# Altium PCB PCB3.PcbDoc
Units mm, origin at the board's own origin, x right, y up, seen from the top; angles counter-clockwise.
Board outline 100 x 100 mm, 2 copper layers (Top Layer, Bottom Layer); 48 components, 44 nets, 134 pads, 8 vias.
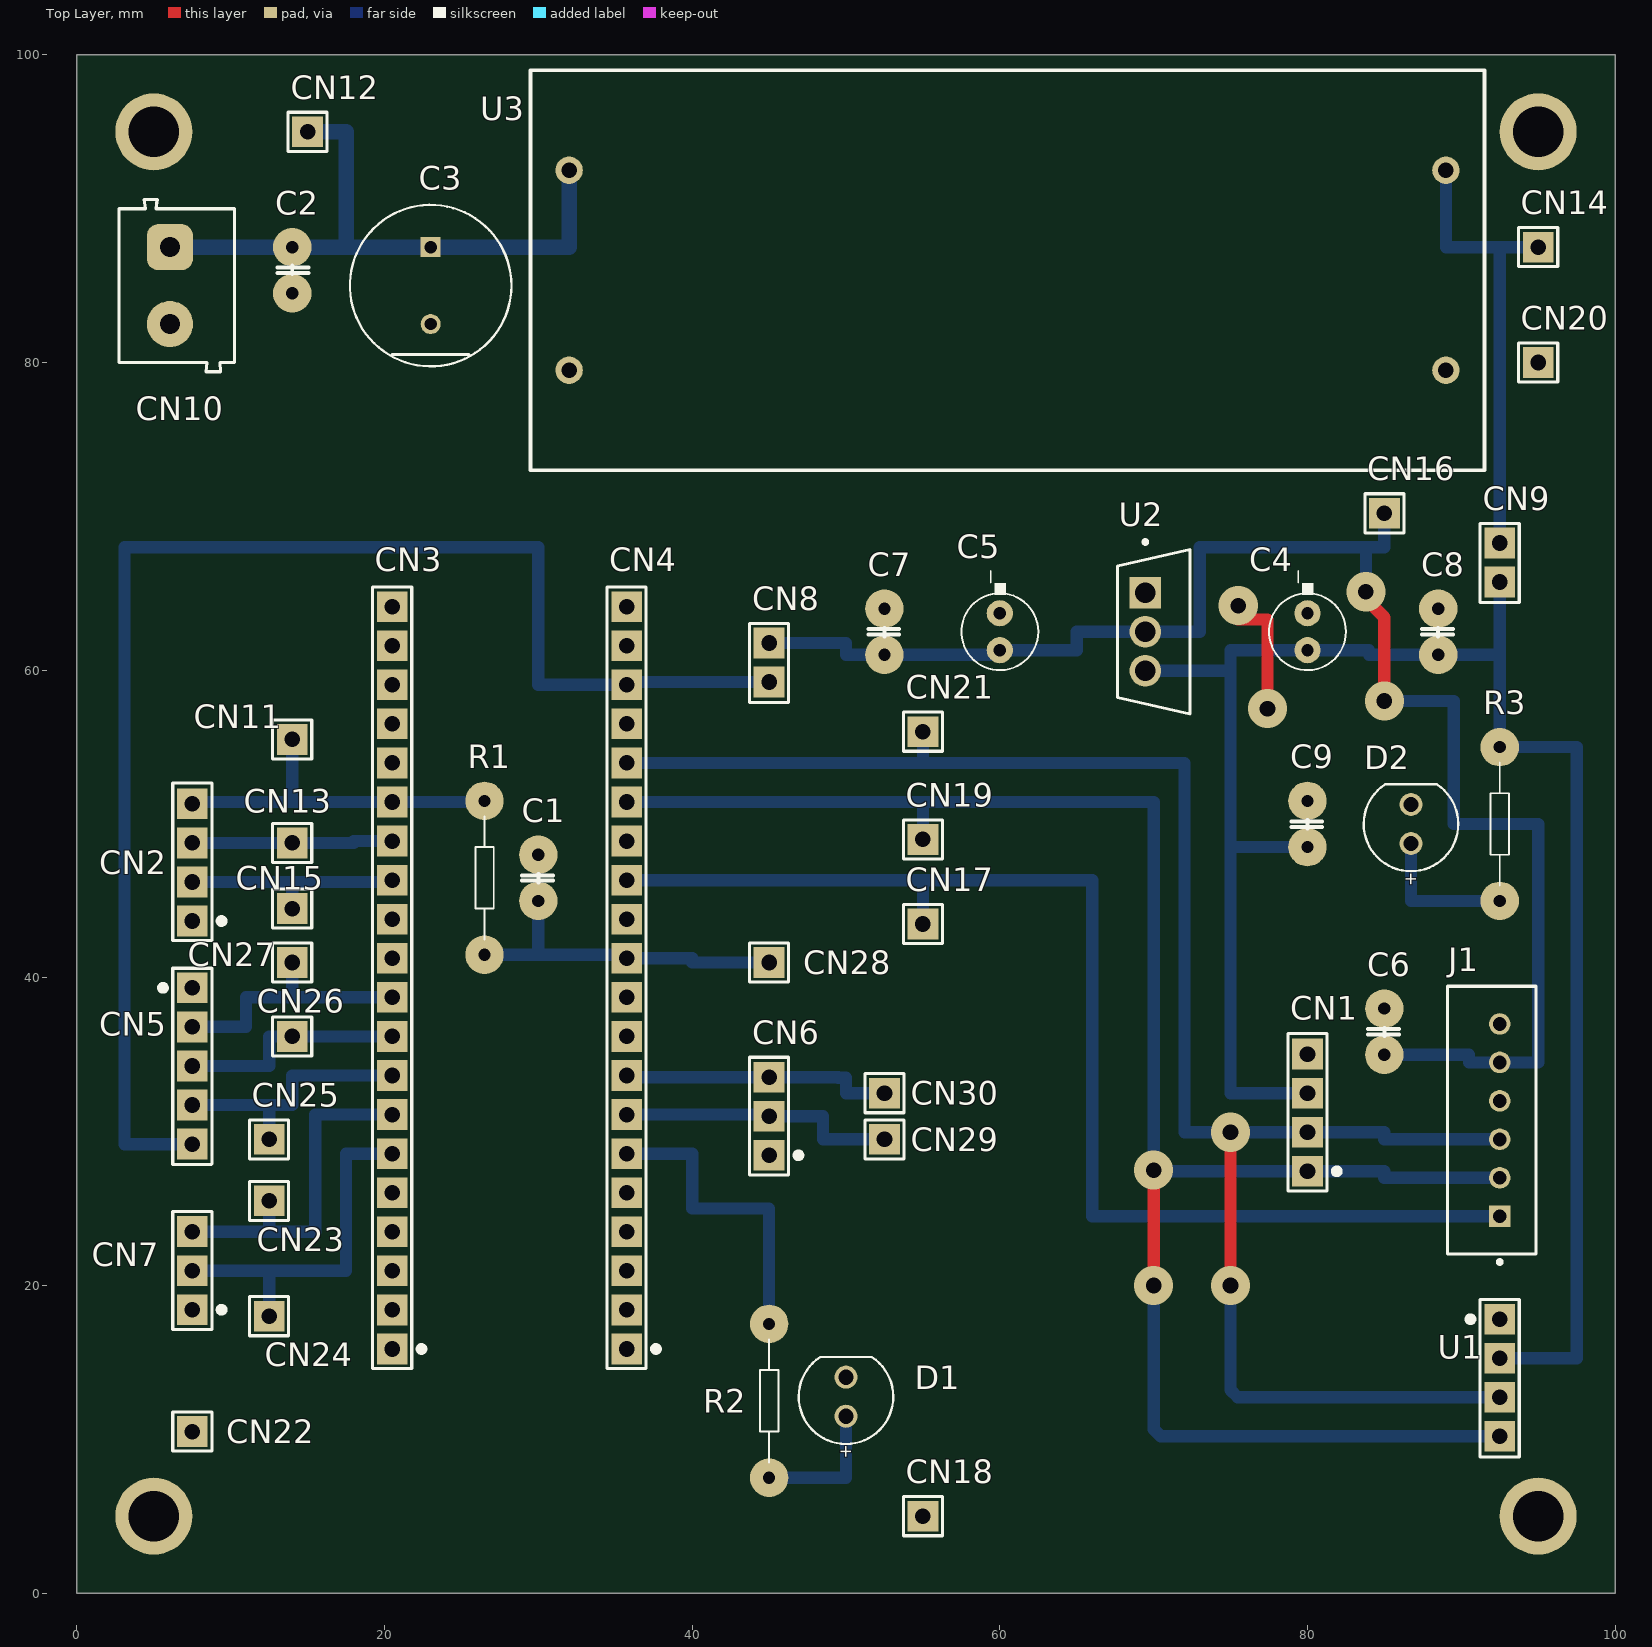
[diagram p0: Top Layer view]
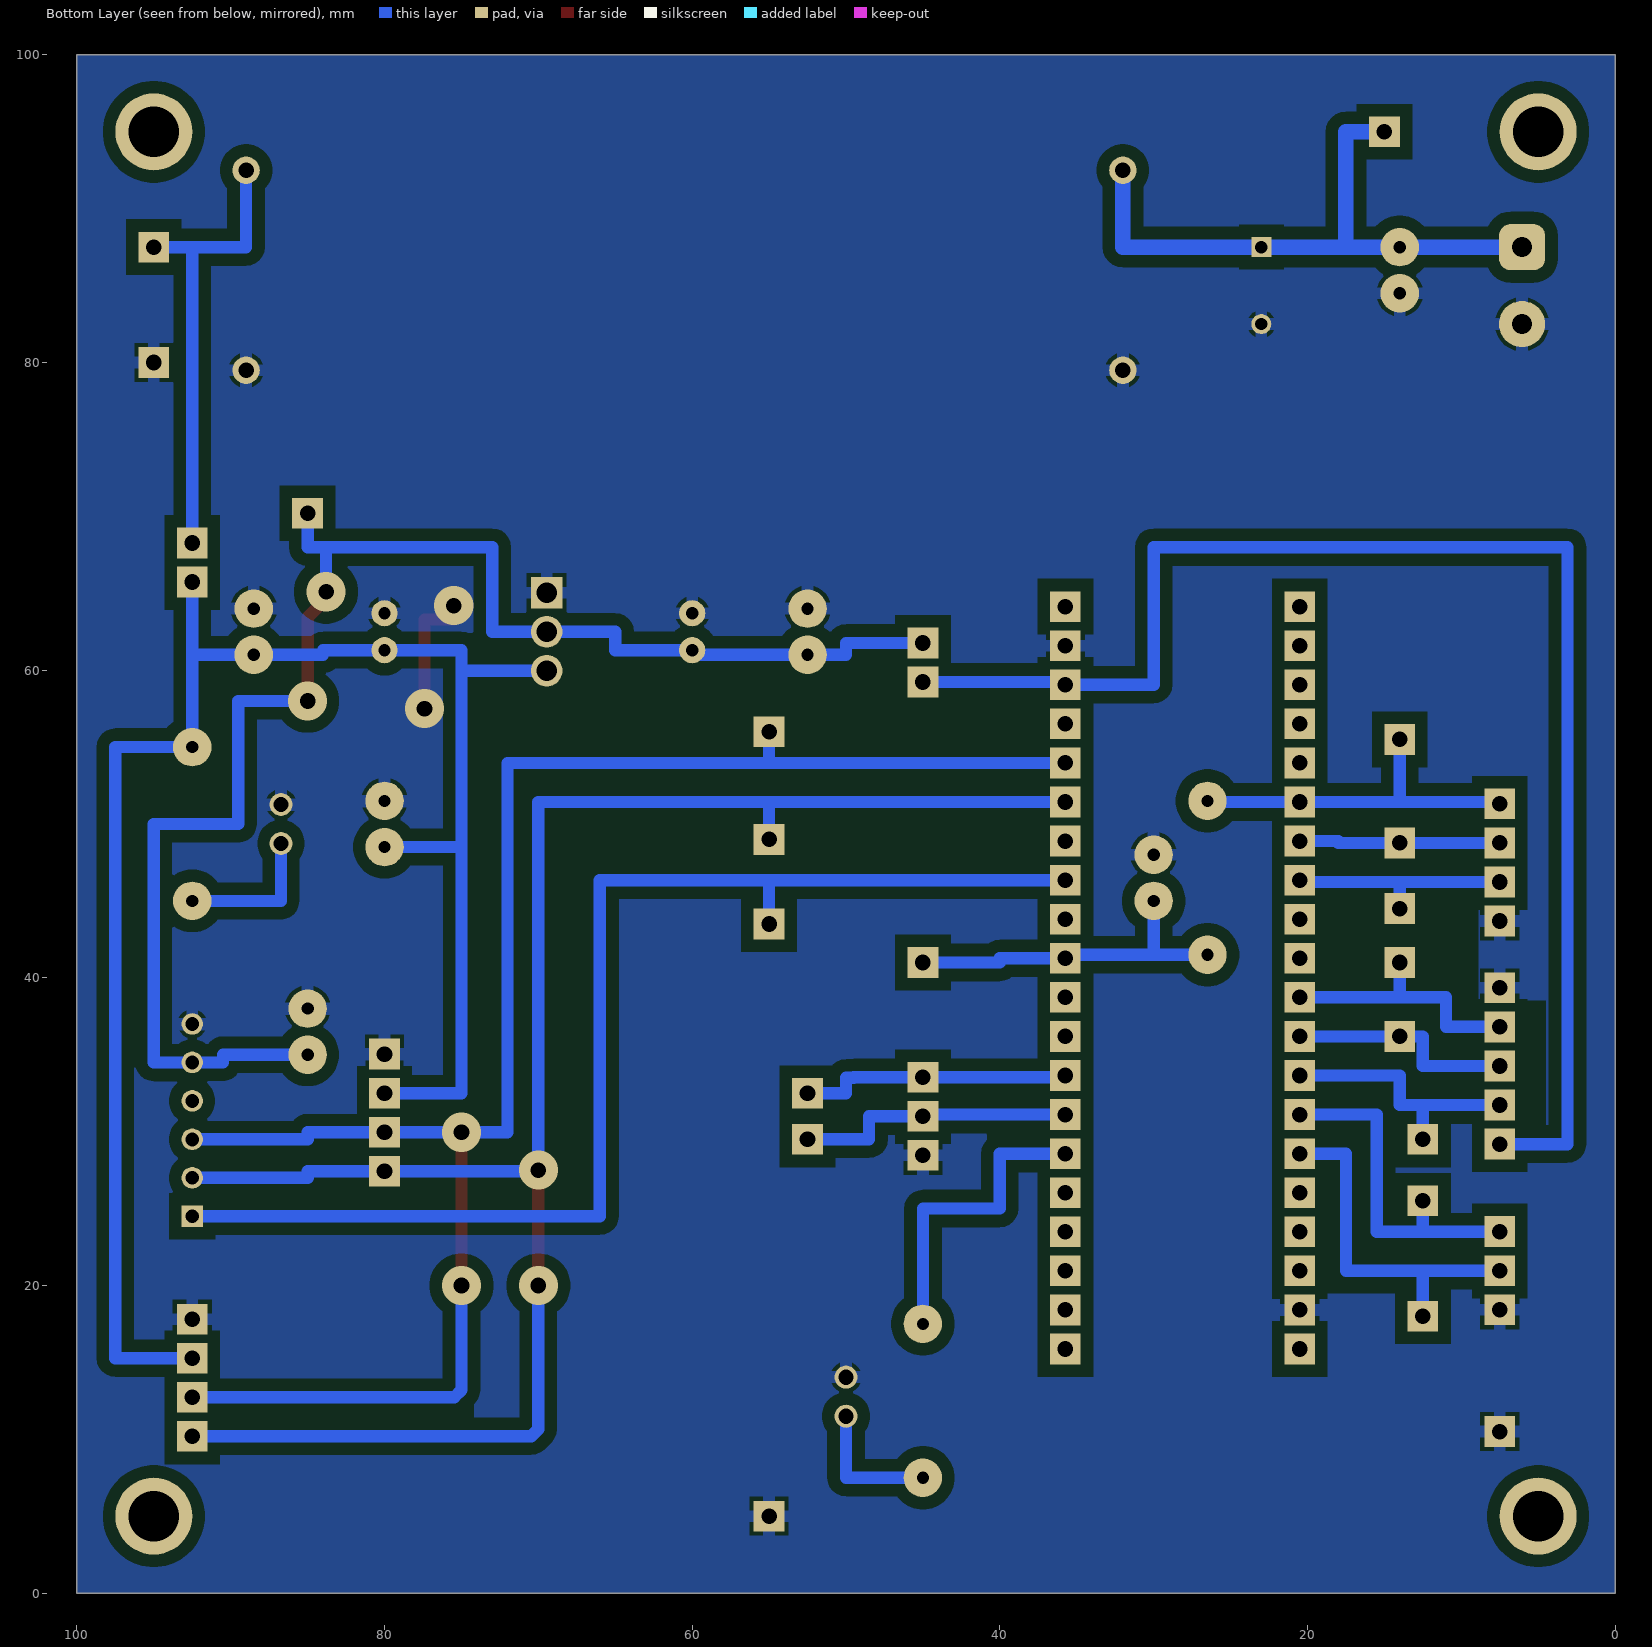
[diagram p1: Bottom Layer view, seen from below]

## Layer stack, top to bottom
Top Solder: solder mask 0.0102, Solder Resist, Dk 3.5
Top Layer: signal copper 0.0356
Dielectric 1: dielectric 0.32, FR-4, Dk 4.8
Bottom Layer: signal copper 0.0356
Bottom Solder: solder mask 0.0102, Solder Resist, Dk 3.5

## Board outline
0,0 100,0 100,100 0,100

## Design rules (kind name [scope] priority, off if disabled: settings)
Clearance Clearance_1 [OnMid vs OnMid] p1: gap=0.4 ignorepadtopadclearanceinfootprint=FALSE sourcerule=36 cellrowname=All cellrowtype=0 cellcolname=All cellcoltype=0 innerlayers=TRUE
Clearance Clearance_2 [(ExistsOnLayer('Top Layer') Or ExistsOnLayer('Bottom Layer')) vs (ExistsOnLayer('Top Layer') Or ExistsOnLayer('Bottom Layer'))] p2: gap=0.4 ignorepadtopadclearanceinfootprint=FALSE sourcerule=36 cellrowname=All cellrowtype=0 cellcolname=All cellcoltype=0 outerlayers=TRUE
Clearance [All] p3: gap=0.254 ignorepadtopadclearanceinfootprint=FALSE ismatrix=TRUE
PolygonConnect [All] p1: connectstyle=Relief reliefconductorwidth=0.8 reliefentries=4 polygonreliefangle="90 Angle" airgapwidth=0.254
RoutingVias [All] p1: holewidth=1.016 width=2.54 viastyle="Through Hole" minholewidth=1.016 minwidth=2.54 maxholewidth=1.016 maxwidth=2.54
SolderMaskExpansion [All] p1: expansion=0.102 istentingtop=FALSE
Width [All] p1: maxlimit=1 minlimit=0.254 preferedwidth=0.8 minimp=50.000000 maximp=50.000000 favimp=50.000000
30 further rules are at their usual default settings.

## Classes and differential pairs
component class TestPoints: CN11 CN12 CN13 CN14 CN15 CN16 CN17 CN18 CN19 CN20 CN21 CN22 CN23 CN24 CN25 CN26 CN27 CN28 CN29 CN30
component class PowerStage: C2 C3 C4 C5 C6 C7 C8 C9 CN9 CN10 D2 R3 U2 U3
component class MainCircuit: C1 CN1 CN2 CN3 CN4 CN5 CN6 CN7 CN8 D1 J1 R1 R2 U1

## Components (designator, comment, footprint, x,y, rotation, side; value= is the part's Value field where it differs from the comment)
C1 "C" CAP_Axial_0.2mm 30,46.5 r90 top
C2 "0.1uF" CAP_Axial_0.2mm 14,86 r270 top
C3 "470uF" C_RAD_11MM 23,85 r90 top
C4 "330uF" C_RAD_5mm 80,62.5 r90 top
C5 "330uF" C_RAD_5mm 60,62.5 r90 top
C6 "0.1uF" CAP_Axial_0.2mm 85,36.5 r90 top
C7 "0.1uF" CAP_Axial_0.2mm 52.5,62.5 r90 top
C8 "0.1uF" CAP_Axial_0.2mm 88.5,62.5 r90 top
C9 "0.1uF" CAP_Axial_0.2mm 80,50 r90 top
CN1 "Header 4X1_Female" 1*4P_FEMALE 80,31.23 r90 top
CN2 "Header 4X1_Female" 1*4P_FEMALE 7.5,47.5 r90 top
CN3 "Header 20x1_Female" 1*20P_FEMALE 20.5,40 r90 top locked
CN4 "Header 20X1_Female" 1*20P_FEMALE 35.74,40 r90 top locked
CN5 "Header 5X1_Female" 1*5P_FEMALE 7.5,33 r270 top
CN6 "Header 3X1_Female" 1*3P_FEMALE 45,31 r90 top
CN7 "Header 3X1_Female" 1*3P_FEMALE 7.5,20.96 r90 top
CN8 "Header 2X1_Male Jumper" "JUMPER 2x1 PIN" 45,60.5 r270 top
CN9 "Header 2X1_Male Jumper" "JUMPER 2x1 PIN" 92.5,67 r270 top
CN10 "CONN_02P" TERMINAL_BLOCK_2_PIN 6.5,85 r270 top
CN11 "Header 1X1_Male" 1*1P_MALE 14,55.5 r90 top
CN12 "Header 1X1_Male" 1*1P_MALE 15,95 r90 top
CN13 "Header 1X1_Male" 1*1P_MALE 14,48.77 r90 top
CN14 "Header 1X1_Male" 1*1P_MALE 95,87.5 r90 top
CN15 "Header 1X1_Male" 1*1P_MALE 14,44.5 r90 top
CN16 "Header 1X1_Male" 1*1P_MALE 85,70.2 r90 top
CN17 "Header 1X1_Male" 1*1P_MALE 55,43.5 r90 top
CN18 "Header 1X1_Male" 1*1P_MALE 55,5 r90 top
CN19 "Header 1X1_Male" 1*1P_MALE 55,49 r90 top
CN20 "Header 1X1_Male" 1*1P_MALE 95,80 r90 top
CN21 "Header 1X1_Male" 1*1P_MALE 55,56 r90 top
CN22 "Header 1X1_Male" 1*1P_MALE 7.5,10.5 r90 top
CN23 "Header 1X1_Male" 1*1P_MALE 12.5,25.5 r90 top
CN24 "Header 1X1_Male" 1*1P_MALE 12.5,18 r90 top
CN25 "Header 1X1_Male" 1*1P_MALE 12.5,29.5 r90 top
CN26 "Header 1X1_Male" 1*1P_MALE 14,36.19 r90 top
CN27 "Header 1X1_Male" 1*1P_MALE 14,41 r90 top
CN28 "Header 1X1_Male" 1*1P_MALE 45,41 r90 top
CN29 "Header 1X1_Male" 1*1P_MALE 52.5,29.5 r90 top
CN30 "Header 1X1_Male" 1*1P_MALE 52.5,32.5 r90 top
D1 "RED LED" LED_DIODE_3.9mm 50,12.77 r90 top
D2 "RED LED" LED_DIODE_3.9mm 86.73,50 r90 top
J1 "B6B-XH-A(LF)(SN)" "JST 6 PIN CONNECTOR" 91.975,30.75 r90 top
R1 "R" RES_AXIAL_3.2_6MM 26.5,46.5 r270 top
R2 "200" RES_AXIAL_3.2_6MM 45,12.5 r90 top
R3 "330" RES_AXIAL_3.2_6MM 92.5,50 r90 top
U1 "Display LCD 1604 i2c Module" 1*4P_FEMALE 92.5,14 r270 top
U2 "IRU1050" IRU1050 70,62.5 r0 top
U3 "STEP_DOWN MODULE" STEP_DOWN_MODULE 60.5,86 r0 top

## Footprints (in the part's own frame and the unit in brackets; to place one, negate y for a bottom-side part, rotate by r counter-clockwise, add the part's x,y. Pads: shape width x height; smd on the part's side, far side on the other; paste and mask are expansions set on the pad)
1*1P_MALE [mm]
  rect 2x2 hole 1.016: 1(0,0)
  silkscreen extent -1.27,-1.27 1.27,1.27, body extent -1.27,-1.19 1.27,1.3, height 8.54
1*3P_FEMALE [mm]
  rect 2x2 hole 1.016: 1(-2.54,0) 2(0,0) 3(2.54,0)
  silkscreen extent -3.81,-2.1 3.84,1.27, body extent -3.81,-1.27 3.81,1.27, height 8.89
1*4P_FEMALE [mm]
  rect 2x2 hole 1.016: 1(-3.81,0) 2(-1.27,0) 3(1.27,0) 4(3.81,0)
  silkscreen extent -5.08,-2.1 5.16,1.27, body extent -5.08,-1.27 5.08,1.27, height 8.89
1*5P_FEMALE [mm]
  rect 2x2 hole 1.016: 1(-6.35,0) 2(-3.81,0) 3(-1.27,0) 4(1.27,0) 5(3.81,0)
  silkscreen extent -7.62,-2.09 5.13,1.27, body extent -7.67,-1.27 5.03,1.32, height 9.2
1*20P_FEMALE [mm]
  rect 2x2 hole 1.016: 1(-24.13,0) 2(-21.59,0) 3(-19.05,0) 4(-16.51,0) 5(-13.97,0) 6(-11.43,0) 7(-8.89,0) 8(-6.35,0) 9(-3.81,0) 10(-1.27,0) 11(1.27,0) 12(3.81,0) 13(6.35,0) 14(8.89,0) 15(11.43,0) 16(13.97,0) 17(16.51,0) 18(19.05,0) 19(21.59,0) 20(24.13,0)
  silkscreen extent -25.4,-2.1 25.4,1.27, body extent -25.65,-1.27 25.65,1.27, height 8.5
C_RAD_5mm [mm]
  round 1.7 hole 0.8: 1(-1.2,0) 2(1.2,0)
  silkscreen extent -2.5,-2.5 3.95,2.5, body extent -2.95,-2.95 3.05,3.05, height 14
C_RAD_11MM [mm]
  rect 1.3x1.3 hole 0.8 paste-2539.97 mask+0: 1(2.5,0)
  round 1.3 hole 0.8 paste-2539.97 mask+0: 2(-2.5,0)
  silkscreen extent -5.25,-5.25 5.25,5.25, body extent -5.35,-5.35 5.35,5.35, height 0.25
CAP_Axial_0.2mm [mm]
  round 2.5 hole 0.8: 1(-1.5,0) 2(1.5,0)
  silkscreen extent -0.3,-0.95 0.25,1.05, body extent -1.85,-1.25 2.85,1.25, height 8.35
IRU1050 [mm]
  rect 2.05x2.05 hole 1.35 paste-2539.97 mask+0: 1(-0.54,2.535)
  round 2.05 hole 1.35 paste-2539.97 mask+0: 2(-0.54,0) 3(-0.54,-2.535)
  silkscreen extent -2.35,-5.34 2.35,5.96, body extent -2.45,-5.44 2.45,5.44, height 0.25
"JST 6 PIN CONNECTOR" [mm]
  rect 1.4x1.4 hole 0.9 paste-2539.97 mask+0: 1(-6.25,-0.525)
  round 1.4 hole 0.9 paste-2539.97 mask+0: 2(-3.75,-0.525) 3(-1.25,-0.525) 4(1.25,-0.525) 5(3.75,-0.525) 6(6.25,-0.525)
  silkscreen extent -9.35,-2.88 8.7,2.88, body extent -8.8,-2.98 8.8,2.98, height 0.25
"JUMPER 2x1 PIN" [mm]
  rect 2x2 hole 1.016: 1(-1.27,0) 2(1.27,0)
  silkscreen extent -2.54,-1.27 2.6,1.27, body extent -2.54,-1.19 2.54,1.3, height 8.54
LED_DIODE_3.9mm [mm] "THT Mono-color Round Color LED, 2-leads"
  round 1.5 hole 1: A(-1.27,0) K(1.27,0)
  silkscreen extent -3.07,-3.07 2.58,3.08, body extent -2.95,-2.95 2.45,2.95, height 9.2
RES_AXIAL_3.2_6MM [mm] "Resistor 1/8 W L=3.2mm W=6mm"
  round 2.5 hole 0.8: 1(-5,0) 2(5,0)
  silkscreen extent -4,-0.6 4,0.6, body extent -5.23,-1 5.22,1, height 2.5
STEP_DOWN_MODULE [mil]
  round 70 hole 40: 1(-1122.05,255.91) 2(-1122.05,-255.91) 3(1122.05,255.91) 4(1122.05,-255.91)
  silkscreen extent -1220,-512 1220,512, body extent -1172,-417 1172,378, height 793
TERMINAL_BLOCK_2_PIN [mm] "5,00mm - modular - blue - Horizontal entry with pressure clamp - 9,9 mm height - 02p"
  rrect50% 3x3 hole 1.3: 1(-2.5,-0.45)
  round 3 hole 1.3: 2(2.5,-0.45)
  silkscreen extent -5.6,-3.75 5.6,3.75, body extent -5.6,-3.75 5.6,3.75, height 9.96

## Part data
C1 C2 C6 C7 C8 C9: library part CAP_NP, "Non-Polarized Capacitor"
C3 C4 C5: library part Cap_Pol, "Polarized Capacitor"
CN1 CN2: "Header, 4-Pin, Single row,female", LatestRevisionDate=17-Jul-2002, LatestRevisionNote="Re-released for DXP Platform.", Publisher="Altium Limited"
CN3: "Header, 16-Pin, Single row,female"
CN4: library part "Header 20x1_Female", "Header, 16-Pin, Single row,female"
CN5: "Header, 5-Pin, Single row,female", LatestRevisionDate=17-Jul-2002, LatestRevisionNote="Re-released for DXP Platform.", Publisher="Altium Limited"
CN6 CN7: "Header, 3-Pin, Single row,female", LatestRevisionDate=17-Jul-2002, LatestRevisionNote="Re-released for DXP Platform.", Publisher="Altium Limited"
CN8 CN9: library part "Jumper 2 Pin", "Header, 2-Pin, Single row,male", LatestRevisionDate=17-Jul-2002, LatestRevisionNote="Re-released for DXP Platform.", Publisher="Altium Limited"
CN10: "Connector Generic 2 Vias"
CN11 CN12 CN13 CN14 CN15 CN16 CN17 CN18 CN19 CN20 CN21 CN22 CN23 CN24 CN25 CN26 CN27 CN28 CN29 CN30: "Header, 1-Pin, Single row,male", LatestRevisionDate=17-Jul-2002, LatestRevisionNote="Re-released for DXP Platform.", Publisher="Altium Limited"
D1 D2: library part LED, "LED"
J1: library part "JST 6 PIN", "CONN HEADER VERT 6POS 2.5MM"
R1 R2 R3: library part RES, "Through-hole Resistor"
U2: library part IRU1050-33, "5A  FIXED 3V3 LOW DROPOUT POSITIVE ADJUSTABLE REGULATOR"
U3: library part STEP_DOWN_MODULE

## Free pads (board coordinates)
  round 5 hole 3.3: x(5,5) x(5,95) x(95,5) x(95,95)

## Via types
v1: diameter 2.54, hole 1.016, Top Layer to Bottom Layer, 8 vias

## Nets (pads, with @x,y where several pads share a name; then routed paths per layer and width w, separated by ;. In a path a pad name is that pad's centre, name@x,y a point inside that pad or via, vN(x,y) a via of type N, cw(c..) or ccw(c..) an arc to the next point about the centre after c; other vN are vias at no path point)
3V3: CN4.18 CN5.5 CN8.2 | length 94.2
  Bottom Layer w0.8: CN5.5 3.1,29.19 3.1,68 30,68 30,59.05 CN4.18 35.74,59.23 CN8.2
3V3D: CN3.1
5V: CN3.3
+3V3: C5.1 C6.1 C7.1 CN8.1 CN16.1 J1.5 U2.2 | length 104.5
  Top Layer w0.8: v1(83.8,65.1) 83.8,64.629 85,63.429 v1(85,58)
  Bottom Layer w0.8: CN8.1 50,61.77 50,61 C7.1 60,61 C5.1 65,61.3 65,62.5 U2.2 73,62.5 73,68 83.8,68 ; v1(83.8,65.1) 83.8,68 ; C6.1 90.5,35 90.5,34.5 J1.5 95,34.5 95,50 89.5,50 89.5,58 v1(85,58) ; CN16.1 85,68 83.8,68
+5: C4.1 C8.1 C9.1 CN1.3 CN9.2 R3.2 U1.2 U2.3 | length 122.6
  Bottom Layer w0.8: U2.3 75,59.965 ; CN1.3 75,32.5 75,48.5 ; C9.1 75,48.5 ; U1.2 97.5,15.27 97.5,55 R3.2 92.5,61 ; CN9.2 92.5,61 ; 75,48.5 75,59.965 ; 75,59.965 75,61.3 C4.1 84,61.3 84,61 C8.1 92.5,61
+12: C2.1 C3.1 CN10.1 CN12.1 U3.1 | length 41
  Bottom Layer w1: CN10.1 C2.1 17.5,87.5 ; CN12.1 17.5,95 17.5,87.5 ; U3.1 32,87.5 C3.1 17.5,87.5
GND: C1.2 C2.2 C3.2 C4.2 C5.2 C6.2 C7.2 C8.2 C9.2 CN1.4 CN2.1 CN3.2 CN4.19 CN5.1 CN6.1 CN7.1 CN10.2 CN18.1 CN20.1 CN22.1 D1.K D2.K J1.6 U1.1 U2.1 U3.2 U3.4 | length 8.6
  Top Layer w0.8: v1(75.5,64.2) 75.5,63.3 77.4,63.3 v1(77.4,57.5)
I2C1_SCL: CN3.7 CN7.3 CN23.1 | length 22.6
  Bottom Layer w0.8: CN7.3 12.5,23.5 ; CN23.1 12.5,23.5 ; CN3.7 15.5,31.11 15.5,23.5 12.5,23.5
I2C1_SDA: CN3.6 CN7.2 CN24.1 | length 23.6
  Bottom Layer w0.8: CN7.2 12.5,20.96 ; CN24.1 12.5,20.96 ; CN3.6 17.5,28.57 17.5,20.96 12.5,20.96
I2C2_ENCO_DIR: CN4.13 CN17.1 J1.1 | length 81.5
  Bottom Layer w0.8: CN4.13 55,46.35 ; CN17.1 55,46.35 ; J1.1 66,24.5 66,46.35 55,46.35
I2C2_SCL: CN1.1 CN4.15 CN19.1 J1.2 U1.4 | length 123.2
  Top Layer w0.8: v1(70,20) v1(70,27.5)
  Bottom Layer w0.8: CN4.15 55,51.43 ; CN19.1 55,51.43 ; v1(70,20) 70,10.659 70.469,10.19 U1.4 ; J1.2 85,27 85,27.42 CN1.1 70,27.42 v1(70,27.5) 70,51.43 55,51.43
I2C2_SDA: CN1.2 CN4.16 CN21.1 J1.3 U1.3 | length 117.7
  Top Layer w0.8: v1(75,20) v1(75,29.96)
  Bottom Layer w0.8: CN4.16 55,53.97 ; CN21.1 55,53.97 ; v1(75,20) 75,13.199 75.469,12.73 U1.3 ; J1.3 85,29.5 85,29.96 CN1.2 v1(75,29.96) 72,29.96 72,53.97 55,53.97
IN_1_MOTOR: CN2.3 CN3.14 CN13.1 | length 13.2
  Bottom Layer w0.8: CN2.3 CN13.1 18,48.77 18,48.89 CN3.14 CN3.14@20.5,48.77
IN_2_MOTOR: CN2.2 CN3.13 CN15.1 | length 14.8
  Bottom Layer w0.8: CN2.2 14,46.23 ; CN15.1 14,46.23 ; CN3.13 20.5,46.23 14,46.23
NetD1_A: D1.A R2.1 | length 9
  Bottom Layer w0.8: R2.1 50,7.5 D1.A
NetD2_A: D2.A R3.1 | length 9.5
  Bottom Layer w0.8: D2.A 86.73,45 R3.1
NRST: CN4.17
PA0: CN4.5
PA1: CN4.6 R2.2 | length 20.3
  Bottom Layer w0.8: CN4.6 40,28.57 40,25 45,25 R2.2
PA4: CN4.9
PA5: CN4.10
PA7: CN4.12
PA8: CN3.16
PA12: CN3.12
PA15: CN3.11
PB1: CN4.14
PB3: CN3.10 CN5.2 CN27.1 | length 17.2
  Bottom Layer w0.8: CN5.2 11,36.81 11,38.73 14,38.73 ; CN27.1 14,38.73 ; CN3.10 14,38.73
PB4: CN3.9 CN5.3 CN26.1 | length 15.1
  Bottom Layer w0.8: CN5.3@7.5,34.5 CN5.3 12.5,34.27 12.5,36.19 CN26.1 CN3.9
PB5: CN3.8 CN5.4 CN25.1 | length 17.1
  Bottom Layer w0.8: CN5.4 12.5,31.73 ; CN25.1 12.5,31.73 ; CN3.8 14,33.65 14,31.73 12.5,31.73
PB8: CN3.5
PB9: CN3.4
PB12: CN3.20
PB13: CN3.19
PB14: CN3.18
PB15: CN3.17
PC13: CN4.2
PC14: CN4.3
PC15: CN4.4
PWM_ADC6: C1.1 CN4.11 CN28.1 R1.2 | length 22.5
  Bottom Layer w0.8: R1.2 30,41.5 ; C1.1 30,41.5 ; CN28.1 40,41 40,41.27 CN4.11 35.74,41.5 30,41.5
TIMER_1_CH_2_PWM: CN2.4 CN3.15 CN11.1 R1.1 | length 23.3
  Bottom Layer w0.8: CN2.4 7.5,51.43 14,51.43 ; CN11.1 14,51.43 ; R1.1 26.5,51.43 CN3.15 14,51.43
TP_5V: CN9.1 CN14.1 U3.3 | length 30.2
  Bottom Layer w0.8: U3.3 89,87.5 92.5,87.5 ; CN9.1 92.5,87.5 ; CN14.1 92.5,87.5
UART2_RX: CN4.8 CN6.3 CN30.1 | length 17.9
  Bottom Layer w0.8: CN4.8 35.74,33.54 CN6.3 49.5,33.54 49.5,33.5 50,33.5 50,32.5 CN30.1
UART2_TX: CN4.7 CN6.2 CN29.1 | length 18.4
  Bottom Layer w0.8: CN4.7 45,31.11 CN6.2 48.5,31 48.5,29.5 CN29.1
VBAT: CN4.1
pads on no net: CN4.20 J1.4

## Polygon pours and split planes (outlines as drawn)
GND on Bottom Layer "NONET_L-01_P-001" (solid, remove dead copper, pour order 0): 0,100 0,0 100,0 100,100

## Other copper
Bottom Layer:
  pour cut-out: 73.6,62.4 74.7,62.4 74.7,61.4 73.6,61.4
  pour cut-out: 92.5,28.9 91.4,28.9 91.4,25.3 92.5,25.3
  pour cut-out: 74.2,14.8 75.8,14.8 75.8,10.5 74.2,10.5
  pour cut-out: 53.9,29.3 51.25,29.3 51.25,32.1 53.9,32.1
  pour cut-out: 40.807,25.807 39.2,25.807 39.2,33.1 40.8,33.1
  pour cut-out: 21.754,19.55 21.754,19.5 13,19.5 13,22.2 21.7,22.2
  pour cut-out: 14.8,30.8 14.8,31.8 8.7,31.8 8.7,30.7
  pour cut-out: 4.5,38.5 6.5,38.5 6.5,30 4.5,30
  pour cut-out: 8.9,45.423 8.9,37.5 12.6,37.5 12.6,45.423

## Silkscreen, mask and mechanical layers (free items; w line width, h text height)
Mechanical 1:
  lines w0.5: 0,5 100,5 ; 0,10 100,10 ; 0,15 100,15 ; 0,20 100,20 ; 0,25 100,25 ; 0,30 100,30 ; 0,35 100,35 ; 0,40 100,40 ; 0,45 100,45 ; 0,50 100,50 ; 0,55 100,55 ; 0,60 100,60 ; 0,65 100,65 ; 0,70 100,70 ; 0,75 100,75 ; 0,80 100,80 ; 0,85 100,85 ; 0,90 100,90 ; 0,95 100,95 ; 5,0 5,100 ; 10,0 10,100 ; 15,0 15,100 ; 20,0 20,100 ; 25,0 25,100 ; 30,0 30,100 ; 35,0 35,100 ; 40,0 40,100 ; 45,0 45,100 ; 50,0 50,100 ; 55,0 55,100 ; 60,0 60,100 ; 65,0 65,100 ; 70,0 70,100 ; 75,0 75,100 ; 80,0 80,100 ; 85,0 85,100 ; 90,0 90,100 ; 95,0 95,100
Board:
  the board outline again, w0.5

## Dimensions
100,100 to 0,100 on Mechanical 3
0,100 to 0,0 on Mechanical 3

## Text inside footprints (layer, text, board x,y; h text height)
D1: Top Overlay "+" at 50.33,8.72 h0.8 r90
D2: Top Overlay "+" at 87.06,45.95 h0.8 r90